# Altium PCB Hall.PcbDoc
Units mm, origin at the board's own origin, x right, y up, seen from the top; angles counter-clockwise.
Board outline 9.02 x 14.6 mm, 2 copper layers (Top Layer, Bottom Layer); 8 components, 4 nets, 18 pads, 5 vias.
Unrouted connection lines stored in the file: 1.
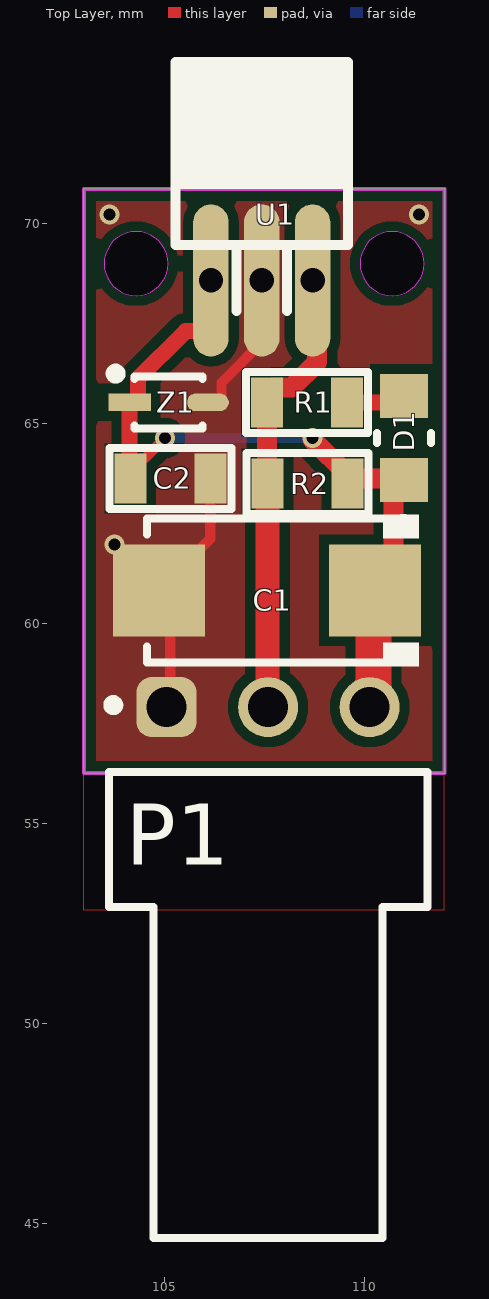
[diagram p0: Top Layer view]
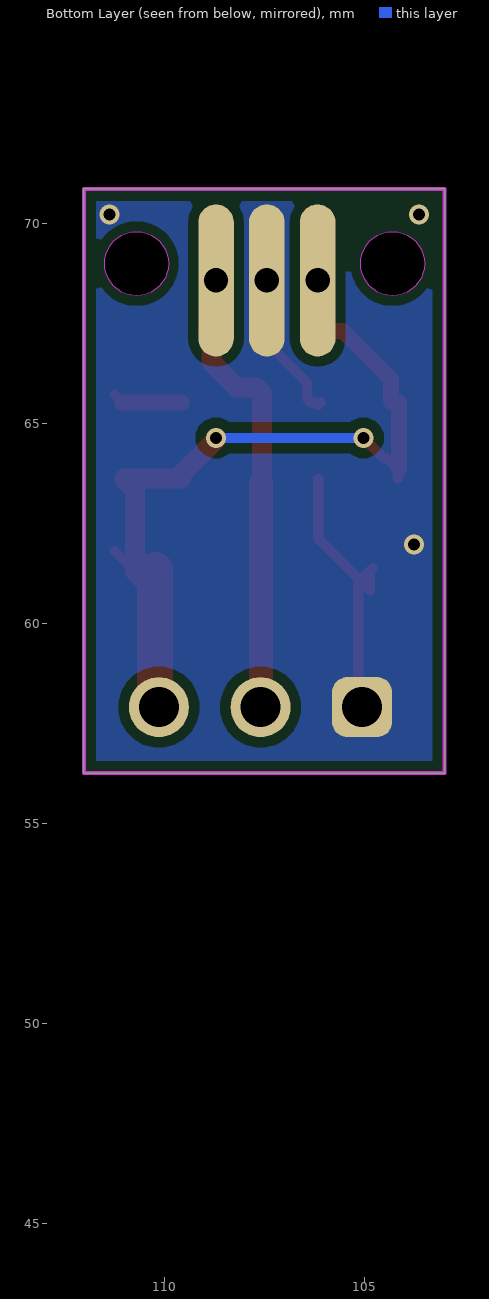
[diagram p1: Bottom Layer view, seen from below]

## Layer stack, top to bottom
Top Solder: solder mask 0.0102, Solder Resist, Dk 3.5
Top Layer: signal copper 0.0356
Dielectric 1: dielectric 0.32, FR-4, Dk 4.8
Bottom Layer: signal copper 0.0356
Bottom Solder: solder mask 0.0102, Solder Resist, Dk 3.5

## Board outline
102.997,56.261 102.997,70.866 112.014,70.866 112.014,56.261
cut-out: 103.5,69 ccw(c104.3,69) 104.3,68.2 ccw(c104.3,69) 105.1,69 ccw(c104.3,69) 104.3,69.8 ccw(c104.3,69)
cut-out: 109.9,69 ccw(c110.7,69) 110.7,68.2 ccw(c110.7,69) 111.5,69 ccw(c110.7,69) 110.7,69.8 ccw(c110.7,69)

## Design rules (kind name [scope] priority, off if disabled: settings)
Clearance [All] p1: gap=0.254 ignorepadtopadclearanceinfootprint=FALSE except(0: Arc-Hole Track-Hole SMDPad-Hole THPad-Hole Via-Hole Fill-Hole Poly-Hole Region-Hole Text-Hole)
PlaneClearance [All] p1: clearance=0.408
PlaneConnect [All] p1: planeconnectstyle=Direct reliefexpansion=0.508 reliefentries=4 reliefconductorwidth=0.254 reliefairgap=0.254
PolygonConnect [All] p1: connectstyle=Direct reliefconductorwidth=0.254 reliefentries=4 polygonreliefangle="90 Angle" airgapwidth=0.254
RoutingVias [All] p1: holewidth=0.5 width=1.27 viastyle="Through Hole" minholewidth=0.1 minwidth=0.27 maxholewidth=0.711 maxwidth=1.57
SolderMaskExpansion [All] p1: expansion=0.102 istentingtop=FALSE
Width [All] p1: maxlimit=0.99 minlimit=0.254 preferedwidth=0.4 minimp=50.000000 maximp=50.000000 favimp=50.000000
28 further rules are at their usual default settings.

## Components (designator, comment, footprint, x,y, rotation, side; value= is the part's Value field where it differs from the comment)
C1 "CAP-POLAR" CAP-TAN-C 107.569,60.833 r180 top
C2 "CAP-NON-POLAR" CAP-0805 105.156,63.627 r180 top
D1 "151031YS06000" LED_RED 110.998,64.643 r90 top
P1 "61900311021" 61900311021 107.6,50.462 r0 top
R1 "10K" RES-0805 108.569,65.532 r0 top
R2 "10K" RES-0805 108.585,63.5 r0 top
U1 "U1881_Hall" U1881 107.442,72.517 r0 top
Z1 "BZX384-C5V1" BZX384-SOD323-IPC_C 105.115,65.532 r0 top

## Footprints (in the part's own frame and the unit in brackets; to place one, negate y for a bottom-side part, rotate by r counter-clockwise, add the part's x,y. Pads: shape width x height; smd on the part's side, far side on the other; paste and mask are expansions set on the pad)
61900311021 [mm] "2.54mm Male Left Angled Header Bottom Locking, 3p"
  rrect50% 1.5x1.5 hole 1: 1(-2.54,7.45)
  round 1.5 hole 1: 2(0,7.45) 3(2.54,7.45)
  silkscreen extent -3.99,-5.82 3.98,7.62, body extent -3.81,-5.75 3.81,7.77, height 5.83
BZX384-SOD323-IPC_C [mm]
  rect 1.055x0.436 smd paste+0 mask+0: 1(-0.975,0)
  rrect100% 1.055x0.436 smd paste+0 mask+0: 2(0.975,0)
  silkscreen extent -1.45,-0.65 0.85,0.84, body extent -1.6,-0.72 1.6,0.72, height 0.25
CAP-0805 [mm]
  rect 0.8x1.25 smd mask+0.015: 1(-1,0) 2(1,0)
  silkscreen extent -1.52,-0.76 1.52,0.76, body extent -1,-0.62 1,0.63, height 0.8
CAP-TAN-C [mm]
  rect 2.3x2.3 smd: 1(-2.7,0) 2(2.7,0)
  silkscreen extent -3.8,-1.9 3,1.9, body extent -2.9,-1.6 2.9,1.6, height 2.6
LED_RED [mm]
  rect 1.1x1.2 smd paste+0 mask+0: 1(-1.05,0) 2(1.05,0)
  silkscreen extent -2.27,-0.67 0.13,0.67, body extent -1.7,-0.77 1.7,0.77, height 0.25
RES-0805 [mm]
  rect 0.8x1.25 smd mask+0.015: 1(-1,0) 2(1,0)
  silkscreen extent -1.52,-0.76 1.52,0.76, body extent -1,-0.62 1,0.63, height 0.6
U1881 [mil]
  oval 35x149.61 hole 24: 1(-50,-155) 2(0,-155) 3(50,-155)
  silkscreen extent -85,-185 85,60, body extent -85,-163 85,63, height 81

## Part data
D1: library part LED, "WURTH ELEKTRONIK - 151031YS06000 - LED, Yellow, Through Hole, T-1 (3mm), 30 mA, 2 V, 590 nm", Manufacturer_Name="Wurth Elektronik", Mouser Part Number=710-151031YS06000, Datasheet Link=https://katalog.we-online.de/led/datasheet/151031YS06000.pdf, Geometry.Height=5.5mm, Manufacturer_Part_Number=151031YS06000, Mouser Price/Stock=https://www.mouser.co.uk/ProductDetail/Wurth-Elektronik/151031YS06000?qs=LlUlMxKIyB3xSYYW%252BcuBiQ%3D%3D
P1: "WR-WTB THT Male Left Angled Bottom Locking Header, pitch 2.54mm, 3pins", Contact Resistance=20mΩ, Manufacturer="Wurth Elektronik", Operating Temperature Max=105°C, Operating Temperature Min=-40°C, Rated Current=3A, Withstanding Voltage=1000VAC, Working Voltage=250VAC, Category="Wire-to-Board Connectors", ComponentLink1Description="Website Link", ComponentLink1URL=https://www.we-online.com/redexpert/article/61900311021?ad, ComponentLink2Description="Datasheet Link", ComponentLink2URL=https://www.we-online.com/redexpert/spec/61900311021?ad, Gender=Male, Height=5.8mm, Length=7.62mm, Manufacturer Part Number=61900311021, Match Code=WR-WTB, Mount="Through Hole", Number of Pins=3, Number of Rows=1, Orientation="Right Angled Bottom Locking", Packaging=Bag, Pitch=2.54mm, Width=12.47mm
R1 R2: library part RES-CONST

## Via types
v1: diameter 0.5, hole 0.3, Top Layer to Bottom Layer, tented both sides, 5 vias

## Nets (pads, with @x,y where several pads share a name; then routed paths per layer and width w, separated by ;. In a path a pad name is that pad's centre, name@x,y a point inside that pad or via, vN(x,y) a via of type N, cw(c..) or ccw(c..) an arc to the next point about the centre after c; other vN are vias at no path point)
GND: C1.2 C2.1 P1.1 U1.2 Z1.2 | length 9.5
  Top Layer w0.254: C1.2@104.791,61.386 C1.2@104.869,61.308 ; C1.2@105.029,61.148 C1.2@104.869,61.308 ; P1.1@105.156,58.25 C1.2@105.156,61.12 ; Z1.2 Z1.2@106.156,65.467 ; C2.1 106.156,62.12 C1.2@105.156,61.12 ; Z1.2@106.257,65.532 106.351,65.532 106.435,65.616 106.435,66.025 107.632,67.222 U1.2@107.632,67.31 ; C1.2@104.869,61.308 C1.2 C1.2@105.156,61.12
  other v1: 103.759,61.976 103.632,70.231 111.379,70.231
NetC1_1: C1.1 C2.2 D1.1 P1.3 R2.2 U1.1 Z1.1 | length 20.8
  Top Layer w0.254: C2.2@104.14,63.868 C2.2@104.156,63.852 ; C2.2 C2.2@104.156,63.852 ; v1(105.029,64.643) 104.511,64.125 104.429,64.125 C2.2@104.156,63.852 ; v1@108.712,64.598 v1(108.712,64.643) ; R2.2 109.585,63.627 R2.2@109.585,63.725 ; C1.1@110.236,61.341 C1.1@110.617,61.722 ; C1.1@110.738,61.302 C1.1@111.252,61.816
  Top Layer w0.4: C2.2@104.14,63.868 Z1.1 104.325,65.532 104.343,65.55 104.343,66.116 105.537,67.31 U1.1@106.362,67.31
  Top Layer w0.5: v1@108.712,64.598 R2.2@109.585,63.725 ; R2.2@109.585,63.627 D1.1@110.998,63.627 ; C1.1 110.506,61.071 110.738,61.302 110.738,63.333 D1.1
  Top Layer w0.9: P1.3@110.236,57.912 110.236,60.833 C1.1@110.236,61.341
  Bottom Layer w0.254: v1(105.029,64.643) v1(108.712,64.643)
NetD1_2: D1.2 R1.2 | length 1.8
  Top Layer w0.254: D1.2@111.057,65.532 D1.2@111.252,65.727
  Top Layer w0.4: R1.2 D1.2@111.057,65.532
NetP1_2: P1.2 R1.1 R2.1 U1.3 | length 10.3
  Top Layer w0.5: R2.1@107.569,63.744 R1.1@107.569,65.757 ; R1.1 R1.1@107.569,65.757 ; P1.2@107.585,58.023 P1.2@107.696,57.912 ; U1.3@108.902,67.31 108.828,67.236 108.828,66.537 108.198,65.907 107.719,65.907 R1.1@107.569,65.757
  Top Layer w0.6: P1.2@107.585,58.023 R2.1

## Polygon pours and split planes (outlines as drawn)
GND on Bottom Layer "GND_L02_P000" (solid, pour order 0): 112.141,70.832 112.141,56.261 102.997,56.261 102.997,70.832
GND on Top Layer "GND_L01_P003" (solid, pour order 3): 102.997,70.889 112.077,70.889 112.077,56.261 102.997,56.261
GND on Top Layer "GND_L01_P002" (solid, pour order 2): 102.997,70.832 111.997,70.832 111.997,52.832 102.997,52.832 102.997,70.832 111.997,70.832 111.997,52.832 102.997,52.832
no net on Top Layer "NONET_L01_P001" (solid, pour order 1): 102.997,70.832 111.997,70.832 111.997,52.832 102.997,52.832 102.997,70.832 111.997,70.832 111.997,52.832 102.997,52.832

## Keep-outs
Keep-Out Layer:
  the board outline again, w0.1